# Altium PCB FIT_PM_Dual_Range_AFE.PcbDoc (part 7 of 17)
Units mm, origin at the board's own origin, x right, y up, seen from the top; angles counter-clockwise.
Board outline 259 x 114 mm, 8 copper layers (Top Layer, Mid-Layer 1, Mid-Layer 2, Layer 1, Layer 2, Mid-Layer 3, Mid-Layer 4, Bottom Layer), stack 1.616 mm thick; 963 components, 806 nets, 4757 pads, 2208 vias.
Unrouted connection lines stored in the file: 682.
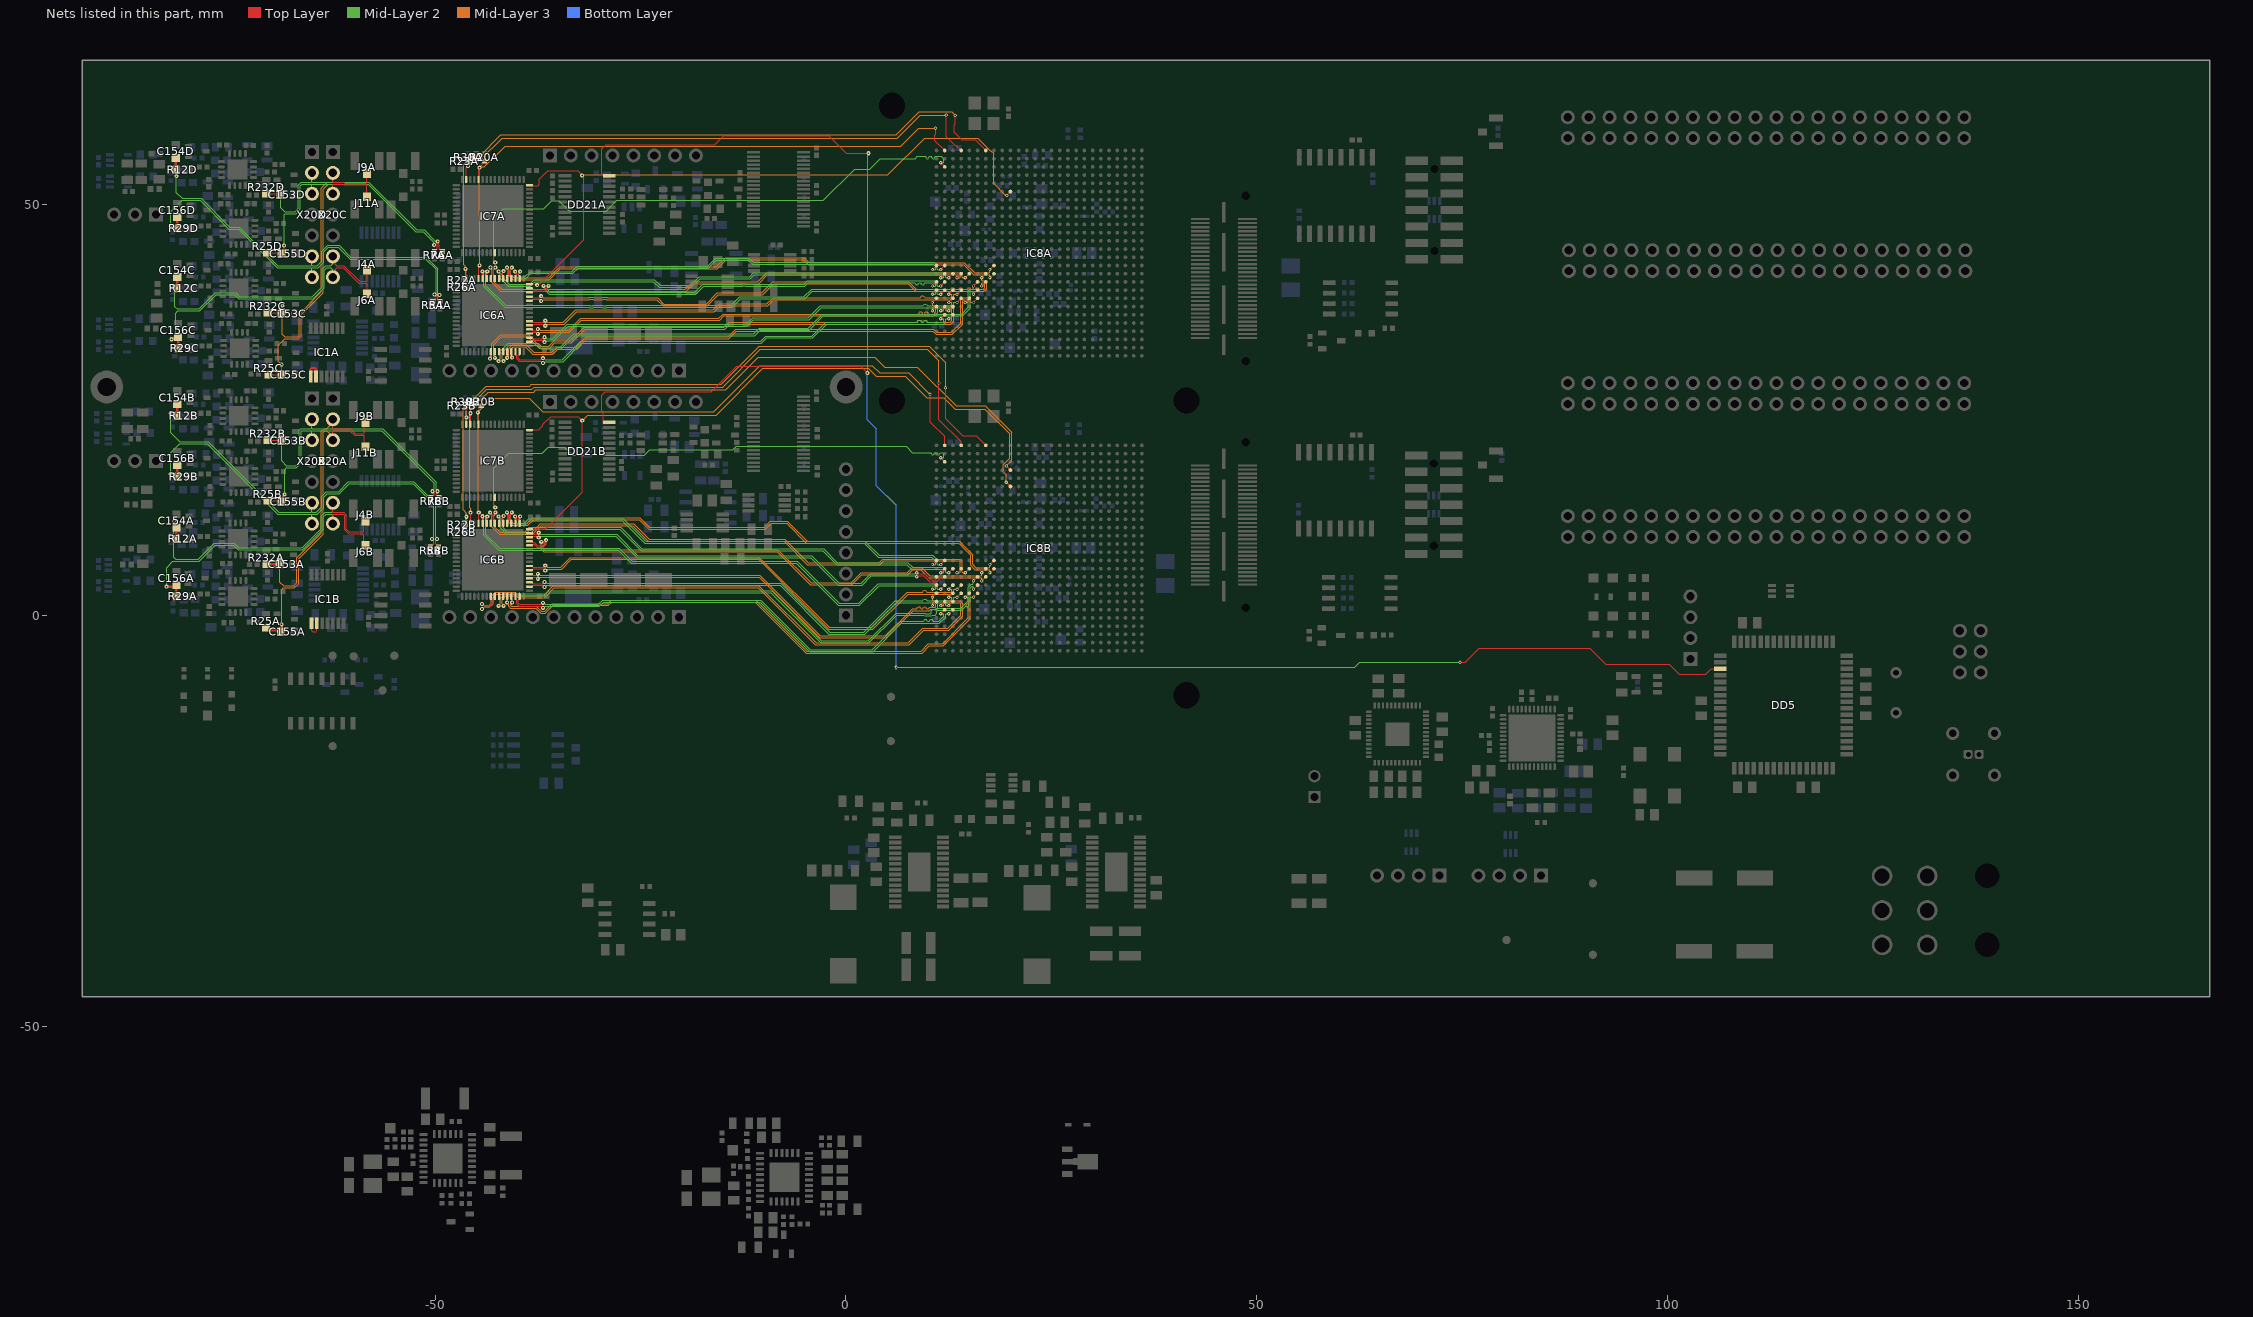
[diagram p9: the nets of this part, all layers, seen from the top]

## Via types
v1: diameter 0.5, hole 0.2, Top Layer to Bottom Layer, tented both sides, 1234 vias
v2: diameter 0.4, hole 0.2, Top Layer to Bottom Layer, tented both sides, 876 vias
v3: diameter 1, hole 0.6, Top Layer to Bottom Layer, tented both sides, 74 vias
v4: diameter 0.8, hole 0.4, Top Layer to Bottom Layer, tented both sides, 15 vias
v5: diameter 0.5, hole 0.2, Top Layer to Bottom Layer, 9 vias

## Nets (pads, with @x,y where several pads share a name; then routed paths per layer and width w, separated by ;. In a path a pad name is that pad's centre, name@x,y a point inside that pad or via, vN(x,y) a via of type N, cw(c..) or ccw(c..) an arc to the next point about the centre after c; other vN are vias at no path point) (continued)
ADC_DATA2: IC6B.14 IC7B.14 IC8B.AC17 | length 92.6
  Top Layer w0.1: IC6B.14@-45.727,11.206 -45.7,11.233 v1(-45.7,12.5) ; IC7B.14@-45.727,23.256 -45.7,23.283 v1(-45.7,24.6)
  Top Layer w0.145: v2(19.519,18.186) IC8B.AC17@20.019,17.686
  Mid-Layer 3 w0.1: v1(-45.7,12.5) -45.7,12.971 -45.8,13.071 -45.8,24.392 -45.7,24.492 v1(-45.7,24.6) -45.7,25.005 -43.548,27.157 -38.034,27.157 -37.748,27.443 -14.657,27.443 -10.7,31.4 3.525,31.4 4.725,30.2 8.705,30.2 13.4,25.505 16.925,25.505 20.169,22.261 20.169,18.836 v2(19.519,18.186)
ADC_DOUT1: IC6A.64 IC7A.64 IC8A.AA17 | length 84
  Top Layer w0.1: IC6A.64@-38.527,40.306 -38.489,40.344 -37.256,40.344 -31.9,45.7 -31.9,53.27 -32.118,53.488 v1(-32.118,53.547) -32.672,54.1 -36.3,54.1 -37.324,53.076 -37.324,52.453 -37.459,52.318 -38.489,52.318 IC7A.64@-38.527,52.356 ; v2(19.554,51.106) 19.554,51.114 20.019,51.578 IC8A.AA17@20.019,51.586
  Mid-Layer 3 w0.1: v1@-32.3,53.6 5.1,53.6 9.572,58.072 16.038,58.072 17.531,56.579 17.617,56.579 17.979,56.217 17.979,52.575 19.354,51.201 19.379,51.201 19.473,51.106 v2(19.554,51.106)
  other v1: -37.6,40.2
ADC_DOUT2: IC6B.64 IC7B.64 IC8B.AA17 | length 89.4
  Top Layer w0.1: IC6B.64@-38.527,10.506 -38.489,10.544 -36.556,10.544 -32.1,15 v1(-32.1,23.7) -32.6,24.2 -35.932,24.2 -36.9,23.232 -36.9,23.1 -37.406,22.594 -38.489,22.594 IC7B.64@-38.527,22.556
  Top Layer w0.145: v2(19.519,16.186) IC8B.AA17@20.019,15.686
  Mid-Layer 3 w0.1: v1(-32.1,23.7) -31.415,24.385 -15.815,24.385 -10.1,30.1 2.7,30.1 3.7,29.1 7.205,29.1 9.805,26.5 11.9,26.5 13.3,25.1 16.905,25.1 19.929,22.076 19.929,19.101 19.169,18.341 19.169,17.474 19.519,17.124 v2(19.519,16.186)
ADC_EN11: IC6A.15 IC8A.AF20 R22A.1 R26A.2 | length 85.8
  Top Layer w0.1: v1(-46.311,42.178) -46.235,42.102 -46.235,41.935 -46.2,41.9 -46.2,41.033 IC6A.15@-46.227,41.006 ; v2(13.3,60.85) 13.3,59.81 13.2,59.71 13.2,58.801 14.113,57.888 15.717,57.888 IC8A.AF20@17.019,56.586
  Mid-Layer 3 w0.1: v1(-46.311,42.178) -46.367,42.235 -46.367,42.528 -46.508,42.669 -46.508,53.992 -46.5,54 -46.5,54.9 -45.5,55.9 -44.6,55.9 -42,58.5 6.1,58.5 8.9,61.3 12.85,61.3 v2(13.3,60.85)
  Bottom Layer w0.1: v1(-46.311,42.178) -46.311,40.809 R22A.1@-46.307,40.806 R26A.2@-46.307,39.906
ADC_EN12: IC6B.15 IC8B.AF20 R22B.1 R26B.2 | length 91.8
  Top Layer w0.1: IC6B.15@-46.227,11.206 -46.2,11.233 v1(-46.2,12) ; v2(12.119,27.686) 12.119,23.952 14.226,21.845 15.86,21.845 IC8B.AF20@17.019,20.686
  Mid-Layer 3 w0.1: v1(-46.2,12) -46.2,12.434 -46.6,12.834 -46.6,25.1 -43.798,27.902 -38.506,27.902 -38.304,28.104 -15.196,28.104 -10.531,32.769 10.111,32.769 12.119,30.761 v2(12.119,27.686)
  Bottom Layer w0.1: R26B.2@-46.307,10.106 R22B.1@-46.307,11.006 -46.2,11.113 v1(-46.2,12)
ADC_EN21: IC7A.15 IC8A.AF23 R23A.1 R30A.2 | length 68.9
  Top Layer w0.1: IC7A.15@-46.227,53.056 -46.227,54.473 v1(-46,54.7) R23A.1@-46,55.3 ; v2(12.2,60.9) 12.2,58.263 13.217,57.245 13.359,57.245 IC8A.AF23@14.019,56.586
  Mid-Layer 3 w0.1: v1(-46,54.7) -45.122,55.578 -44.375,55.578 -41.861,58.092 6.228,58.092 9.036,60.9 v2(12.2,60.9)
  Bottom Layer w0.1: v1(-46,54.7) R30A.2@-46,55.3
ADC_EN22: IC7B.15 IC8B.AF23 R23B.1 R30B.2 | length 77.2
  Top Layer w0.1: R23B.1@-46.3,25.5 -46.2,25.4 v1(-46.2,24.1) -46.2,23.283 IC7B.15@-46.227,23.256 ; v2(11.319,28.286) 11.319,23.811 14.019,21.111 IC8B.AF23@14.019,20.686
  Mid-Layer 3 w0.1: v1(-46.2,24.1) -46.2,25 -43.698,27.502 -38.242,27.502 -37.973,27.77 -15.03,27.77 -10.406,32.394 9.893,32.394 11.319,30.968 v2(11.319,28.286)
  Bottom Layer w0.1: R30B.2@-46.3,25.5 -46.2,25.4 v1(-46.2,24.1)
ADC_PLL_PWRDNB: DD5.19 DD21A.12 DD21B.12 | length 243.4
  Top Layer w0.1: DD21B.12@-28.8,23.493 -29.375,23.493 -29.525,23.643 -29.525,24.725 -29.7,24.9 -29.7,26.8 -29.3,27.2 -16.4,27.2 -13.3,30.3 1.8,30.3 v1(2.6,29.5) ; DD21A.12@-28.8,53.492 -29.375,53.492 -29.7,53.817 -29.7,56.8 -29.2,57.3 -16,57.3 -14.9,58.4 -2.1,58.4 0.052,56.248 v1(2.723,56.248)
  Top Layer w0.15: v2(74.731,-5.714) 75.4,-5.714 77.1,-4.014 90.557,-4.014 92.498,-5.955 100.184,-5.955 101.421,-7.192 104.656,-7.192 105.334,-6.514 DD5.19@106.419,-6.514 DD5.19@106.34,-6.593
  Mid-Layer 2 w0.1: v2(6.1,-6.3) 61.933,-6.3 62.519,-5.714 v2(74.731,-5.714)
  Bottom Layer w0.1: v1(2.723,56.248) 2.662,56.186 2.662,29.562 v1(2.6,29.5) 2.6,23.8 3.7,22.7 3.7,15.8 6.1,13.4 6.1,-6.6
ADC_RESET1: IC6A.12 IC7A.12 IC8A.AF25 R20A.1 | length 76.9
  Top Layer w0.1: IC6A.12@-44.727,41.006 -44.727,42.373 -44.6,42.5 v1(-44.6,42.6) ; IC7A.12@-44.727,53.056 -44.727,54.149 -44.671,54.205 -44.671,54.429 -44.26,54.84 -44.26,55.06 -44.02,55.3 R20A.1@-44,55.3 ; v2(10.9,59.3) 10.9,58.543 10.819,58.462 10.819,57.786 IC8A.AF25@12.019,56.586
  Mid-Layer 3 w0.1: v1(-44.6,42.6) -44.6,42.975 -44.592,42.983 -44.592,48.486 -44.66,48.554 -44.66,54.44 -44.5,54.6 -44,54.6 -41.5,57.1 6.683,57.1 8.883,59.3 v2(10.9,59.3)
  other v1: -44.6,54.5
ADC_RESET2: IC6B.12 IC7B.12 IC8B.AF25 R20B.1 | length 83.2
  Top Layer w0.1: IC6B.12@-44.727,11.206 -44.7,11.233 v1(-44.7,12.5) ; IC7B.12@-44.727,23.256 -44.766,23.294 -44.766,24.666 v1(-44.8,24.7) -44.8,24.808 -44.66,24.948 -44.66,25.26 -44.42,25.5 R20B.1@-44.4,25.5 ; v2(10.227,26.931) 10.272,26.886 10.272,23.521 12.019,21.774 IC8B.AF25@12.019,20.686
  Mid-Layer 3 w0.1: v1(-44.7,12.5) -44.75,12.55 -44.75,24.65 v1(-44.8,24.7) -43.071,26.429 -38.529,26.429 -36.9,24.8 -16.1,24.8 -10.5,30.4 3.2,30.4 4.1,29.5 7.658,29.5 v2(10.227,26.931)
ADC_VREFA: IC1A.8 IC1A.9 | length 2.7
  Top Layer w0.2: IC1A.8@-65.15,29.05 -65.2,29.1 -65.2,29.983 -65.083,30.1 -64.617,30.1 -64.5,29.983 IC1A.9@-64.5,29.05
ADC_VREFB: IC1B.8 IC1B.9 | length 2.6
  Top Layer w0.145: IC1B.8@-65.054,-0.963 -65.054,-1.846 -64.9,-2 -64.5,-2 -64.404,-1.904 IC1B.9@-64.404,-0.963
ADCA_VINA_N: C155A.2 J11B.1 R25A.2 X20A.3 | length 37.8
  Top Layer w0.1: X20A.3@-62.46,21.32 -62.46,22.431 -62.401,22.49 -61.447,22.49 -60.4,22.49 -59.81,21.9 -58.7,21.9 -58.641,21.841 -58.641,20.666 J11B.1@-58.5,20.525
  Top Layer w0.3: R25A.2@-70.6,-1.5 -70.3,-1.8 -69,-1.8 C155A.2@-68.8,-2 -68.7,-1.9 v1(-68.7,-1.1)
  Mid-Layer 3 w0.1: v1(-68.7,-1.1) -68.7,3.137 -68.494,3.343 -67.132,3.343 -66.6,3.875 -66.6,6.9 -63.6,9.9 -63.6,22.3 -63.43,22.47 -63.2,22.47 -62.46,21.73 X20A.3@-62.46,21.32
ADCA_VINA_P: C153A.2 J9B.1 R232A.2 X20A.2 | length 36.5
  Top Layer w0.1: X20A.2@-62.46,23.86 -62.46,22.749 -62.401,22.69 -61.53,22.69 -60.317,22.69 -59.727,22.1 -58.7,22.1 -58.641,22.159 -58.641,23.334 J9B.1@-58.5,23.475
  Top Layer w0.3: R232A.2@-70.55,6.225 C153A.2@-68.95,6.225 -68.9,6.275 v1(-68.9,7.1)
  Mid-Layer 3 w0.1: v1(-68.9,7.1) -68.9,4.04 -68.443,3.583 -67.231,3.583 -66.84,3.974 -66.84,6.999 -63.84,9.999 -63.84,22.399 -63.529,22.71 -63.2,22.71 -62.46,23.45 X20A.2@-62.46,23.86
ADCA_VINB_N: C155B.2 R7B.1 R25B.2 X20B.3 | length 35.2
  Top Layer w0.145: R25B.2@-70.4,13.929 -68.8,13.929 C155B.2@-68.7,13.829 -68.581,13.948 -68.581,14.461 v1(-68.324,14.718) ; R7B.1@-50.5,14.34 -50.283,14.557 -50.229,14.557 -50.144,14.642 -50.144,14.848 -50.144,14.949 -50.295,15.1 v1(-50.322,15.1)
  Mid-Layer 2 w0.1: v1(-68.324,14.718) -68.324,17.736 -68.1,17.96 -66.9,17.96 -66.3,18.56 -66.3,22.411 -66.241,22.47 -65.629,22.47 -65.059,22.47 -65,22.411 ; v1(-50.322,15.1) -50.322,15.179 -50.142,15.359 -50.142,16.107 -56.504,22.47 -64.941,22.47 -65,22.411 ; -65,22.411 X20B.3@-65,21.32 -65,22.411
ADCA_VINB_P: C153B.2 R6B.1 R232B.2 X20B.2 | length 36.2
  Top Layer w0.145: R232B.2@-70.4,21.329 -68.8,21.329 C153B.2@-68.7,21.229 v1(-68.7,22.1) ; v1(-49.722,15.1) -49.748,15.1 -49.899,14.949 -49.899,14.642 -49.814,14.557 -49.761,14.557 R6B.1@-49.543,14.34
  Mid-Layer 2 w0.1: v1(-68.7,22.1) -68.7,18.8 -68.1,18.2 -66.999,18.2 -66.54,18.659 -66.54,22.511 -66.341,22.71 -65.53,22.71 -65.059,22.71 -65,22.769 ; v1(-49.722,15.1) -49.722,15.179 -49.902,15.359 -49.902,16.207 -56.405,22.71 -64.941,22.71 -65,22.769 ; -65,22.769 X20B.2@-65,23.86 -65,22.769
ADCA_VINC_N: C155C.2 J11A.1 R25C.2 X20C.3 | length 36.9
  Top Layer w0.1: X20C.3@-62.46,51.32 -62.46,52.431 -62.401,52.49 -61.847,52.49 -61.2,52.49 -61.11,52.4 -58.4,52.4 -58.341,52.341 -58.341,50.973 J11A.1@-58.3,50.932
  Top Layer w0.145: R25C.2@-70.3,29.3 C155C.2@-68.7,29.3 v1(-68.7,30.5)
  Mid-Layer 3 w0.1: v1(-68.7,30.5) -69.1,30.9 -69.1,32.86 -68.3,33.66 -66.601,33.66 -66.3,33.961 -66.3,36.561 -63.6,39.261 -63.6,51.884 -63.014,52.47 -62.519,52.47 -62.46,52.411 X20C.3@-62.46,51.32
ADCA_VINC_P: C153C.2 J9A.1 R232C.2 X20C.2 | length 36.8
  Top Layer w0.1: X20C.2@-62.46,53.86 -62.46,52.749 -62.401,52.69 -61.93,52.69 -61.117,52.69 -61.027,52.6 -58.4,52.6 -58.341,52.659 -58.341,53.734 J9A.1@-58.3,53.775
  Top Layer w0.145: R232C.2@-70.4,36.829 -68.8,36.829 C153C.2@-68.7,36.729 -68.6,36.829 v1(-68.6,37.7)
  Mid-Layer 3 w0.1: v1(-68.6,37.7) -68.6,34.2 -68.3,33.9 -66.7,33.9 -66.54,34.06 -66.54,36.66 -63.84,39.36 -63.84,51.983 -63.113,52.71 -62.519,52.71 -62.46,52.769 X20C.2@-62.46,53.86
ADCA_VIND_N: C155D.2 R7A.1 R25D.2 X20D.3 | length 34.8
  Top Layer w0.145: R25D.2@-70.4,44.129 -68.8,44.129 C155D.2@-68.7,44.029 -68.387,44.341 v1(-68.387,45.018) ; v1(-50.126,45.074) -50.1,45.1 -49.9,45.1 -49.744,44.944 -49.744,44.73 -49.744,44.602 -49.829,44.517 -49.883,44.517 R7A.1@-50.1,44.3
  Mid-Layer 2 w0.1: v1(-68.387,45.018) -68.387,48.773 -68.26,48.9 -66.938,48.9 -66.4,49.438 -66.4,52.27 -66.2,52.47 -65.579,52.47 -65.059,52.47 -65,52.411 ; v1(-50.126,45.074) -50.181,45.13 -50.181,45.385 -51.462,46.665 -52.365,46.665 -58.17,52.47 -64.941,52.47 -65,52.411 ; -65,52.411 X20D.3@-65,51.32 -65,52.411
ADCA_VIND_P: C153D.2 R6A.1 R232D.2 X20D.2 | length 34.3
  Top Layer w0.145: R232D.2@-70.568,51.296 -68.968,51.296 C153D.2@-68.868,51.196 -68.8,51.264 v1(-68.8,52.1) ; v1(-49.701,45.499) -49.727,45.473 -49.727,45.273 -49.499,45.046 -49.499,44.831 -49.499,44.602 -49.414,44.517 -49.361,44.517 R6A.1@-49.143,44.3
  Mid-Layer 2 w0.1: v1(-68.8,52.1) -68.8,49.6 -68.34,49.14 -67.038,49.14 -66.64,49.538 -66.64,52.369 -66.299,52.71 -65.48,52.71 -65.059,52.71 -65,52.769 ; v1(-49.701,45.499) -49.757,45.554 -50.011,45.554 -51.362,46.905 -52.266,46.905 -58.071,52.71 -64.941,52.71 -65,52.769 ; -65,52.769 X20D.2@-65,53.86 -65,52.769
ADCAA_D0_N1: IC6A.41 IC8A.G25 | length 65.1
  Top Layer w0.1: v1(-42.73,31.344) v1(-42.73,31.344) -42.729,32.105 IC6A.41@-42.727,32.106
  Top Layer w0.145: v2(11.519,37.086) IC8A.G25@12.019,37.586
  Mid-Layer 3 w0.1: v1(-42.73,31.344) -42.664,31.41 -42.691,31.41 -42.884,31.603 -42.884,32.959 -41.943,33.9 -38.725,33.9 -37.362,32.538 -36.062,32.538 -35.44,33.16 -33.422,33.16 -31.752,34.83 -14.748,34.83 -14.125,35.453 12.772,35.453 13.109,35.791 13.109,37.33 12.764,37.676 12.248,37.676 11.899,37.327 11.899,37.144 11.841,37.086 v2(11.519,37.086)
ADCAA_D0_N2: IC6B.41 IC8B.G25 | length 72.9
  Top Layer w0.1: v1(-44.302,0.775) -44.244,0.775 -44.044,0.975 -43.419,0.975 -42.877,1.517 -42.877,1.847 -42.727,1.997 IC6B.41@-42.727,2.306
  Top Layer w0.145: v2(11.519,1.186) IC8B.G25@12.019,1.686
  Mid-Layer 3 w0.1: v1(-44.302,0.775) -44.224,0.775 -44.044,0.955 -43.398,0.955 -42.956,1.398 -42.956,2.209 -42.605,2.56 -40.331,2.56 -39.917,2.146 -36.738,2.146 -35.525,3.36 -10.699,3.36 -3.739,-3.6 7.7,-3.6 9.46,-1.84 12.514,-1.84 14.24,-0.114 14.24,1.5 13.937,1.803 12.162,1.803 11.899,1.541 11.899,1.244 11.841,1.186 v2(11.519,1.186)
ADCAA_D0_P1: IC6A.40 IC8A.G24 | length 65.1
  Top Layer w0.1: v1(-43.322,31.244) -43.266,31.3 -43.266,32.068 IC6A.40@-43.227,32.106
  Top Layer w0.145: v2(12.519,37.086) IC8A.G24@13.019,37.586
  Mid-Layer 3 w0.1: v1(-43.322,31.244) -43.322,31.318 -43.124,31.515 -43.124,33.058 -42.042,34.14 -38.625,34.14 -37.263,32.778 -36.162,32.778 -35.539,33.4 -33.521,33.4 -31.851,35.07 -14.847,35.07 -14.224,35.693 8.672,35.693 8.722,35.693 8.811,35.781 8.811,35.858 8.899,35.947 9.076,35.947 9.165,35.858 9.165,35.781 9.253,35.693 9.43,35.693 9.519,35.781 9.519,35.858 9.607,35.947 9.784,35.947 9.873,35.858 9.873,35.781 9.961,35.693 10.019,35.693 12.672,35.693 12.869,35.89 12.869,37.231 12.664,37.436 12.348,37.436 12.139,37.227 12.139,37.144 12.198,37.086 v2(12.519,37.086)
ADCAA_D0_P2: IC6B.40 IC8B.G24 | length 71.4
  Top Layer w0.1: v1(-44.302,1.375) -44.244,1.375 -44.044,1.175 -43.502,1.175 -43.077,1.6 -43.077,1.847 -43.227,1.997 IC6B.40@-43.227,2.306
  Top Layer w0.145: v2(12.519,1.186) IC8B.G24@13.019,1.686
  Mid-Layer 3 w0.1: v1(-44.302,1.375) -44.224,1.375 -44.044,1.195 -43.497,1.195 -43.196,1.497 -43.196,2.308 -42.704,2.8 -40.231,2.8 -39.817,2.386 -36.838,2.386 -35.624,3.6 -10.6,3.6 -3.64,-3.36 7.6,-3.36 9.361,-1.6 12.415,-1.6 14,-0.015 14,1.401 13.837,1.563 12.261,1.563 12.139,1.441 12.139,1.244 12.198,1.186 v2(12.519,1.186)
ADCAA_D2_N1: IC6A.43 IC8A.J21 | length 65.5
  Top Layer w0.1: IC6A.43@-41.727,32.106 -41.727,31.797 -41.877,31.647 -41.877,31.209 -41.677,31.009 v1(-41.677,30.95)
  Top Layer w0.145: v2(15.519,39.086) IC8A.J21@16.019,39.586
  Mid-Layer 2 w0.1: v1(-41.677,30.95) -41.677,31.029 -41.857,31.209 -41.857,32.043 -41,32.9 -37.548,32.9 -37.102,32.454 -34.642,32.454 -33.036,34.06 -11.101,34.06 -10.439,34.721 -4.485,34.721 -2.767,36.439 14.189,36.439 15.151,37.401 15.151,39.4 15.217,39.466 15.461,39.466 15.519,39.407 v2(15.519,39.086)
ADCAA_D2_N2: IC6B.43 IC8B.J21 | length 67.7
  Top Layer w0.1: IC6B.43@-41.727,2.306 -41.727,1.997 -41.877,1.847 -41.877,1.409 -41.677,1.209 v1(-41.677,1.15)
  Top Layer w0.145: v2(15.519,3.186) IC8B.J21@16.019,3.686
  Mid-Layer 2 w0.1: v1(-41.677,1.15) -41.677,1.229 -41.857,1.409 -41.857,1.943 -41.44,2.36 -36.44,2.36 -36.075,2.724 -9.164,2.724 -3.085,-3.354 2.802,-3.354 6.191,0.035 9.494,0.035 9.565,-0.036 10.409,-0.036 10.486,0.04 10.568,0.04 10.574,0.035 10.864,0.035 11.069,0.24 11.069,0.494 11.171,0.596 14.075,0.596 14.277,0.798 14.563,1.084 14.688,1.084 14.724,1.048 14.849,1.048 14.974,1.173 14.974,1.298 14.938,1.334 14.938,1.459 15.091,1.612 15.151,1.672 15.151,3.343 15.378,3.57 15.461,3.57 15.519,3.511 v2(15.519,3.186)
ADCAA_D2_P1: IC6A.42 IC8A.K21 | length 65.9
  Top Layer w0.1: v1(-42.277,30.95) -42.277,31.009 -42.077,31.209 -42.077,31.647 -42.227,31.797 IC6A.42@-42.227,32.106
  Top Layer w0.145: v2(15.519,40.086) IC8A.K21@16.019,40.586
  Mid-Layer 2 w0.1: v1(-42.277,30.95) -42.277,31.029 -42.097,31.209 -42.097,32.142 -41.099,33.14 -37.448,33.14 -37.002,32.694 -34.741,32.694 -33.135,34.3 -11.2,34.3 -10.539,34.961 -4.584,34.961 -2.867,36.679 14.09,36.679 14.911,37.5 14.911,39.5 15.117,39.706 15.461,39.706 15.519,39.764 v2(15.519,40.086)
ADCAA_D2_P2: IC6B.42 IC8B.K21 | length 67.9
  Top Layer w0.1: v1(-42.277,1.15) -42.277,1.209 -42.077,1.409 -42.077,1.847 -42.227,1.997 IC6B.42@-42.227,2.306
  Top Layer w0.145: v2(15.519,4.194) 15.523,4.194 16.015,4.686 IC8B.K21@16.019,4.686
  Mid-Layer 2 w0.1: v1(-42.277,1.15) -42.277,1.229 -42.097,1.409 -42.097,2.042 -41.539,2.6 -36.539,2.6 -36.175,2.964 -9.064,2.964 -2.986,-3.114 2.702,-3.114 6.092,0.275 9.594,0.275 9.665,0.204 10.31,0.204 10.369,0.263 10.369,0.53 10.574,0.735 10.864,0.735 10.876,0.723 10.959,0.723 11.072,0.836 13.975,0.836 14.107,0.968 14.911,1.772 14.911,3.443 15.278,3.81 15.461,3.81 15.519,3.868 v2(15.519,4.194)
ADCAA_D4_N1: IC6A.45 IC8A.H22 | length 64.2
  Top Layer w0.1: IC6A.45@-40.727,32.106 -40.689,32.068 -40.689,31.415 v1(-40.64,31.366)
  Top Layer w0.145: v2(14.519,38.086) IC8A.H22@15.019,38.586
  Mid-Layer 3 w0.1: v1(-40.64,31.366) -40.64,31.445 -40.82,31.625 -40.82,32.38 -40.5,32.7 -39.039,32.7 -38.099,31.76 -35.72,31.76 -35.061,32.419 -32.789,32.419 -31.528,33.68 -14.239,33.68 -13.331,34.589 10.592,34.589 10.98,34.201 12.941,34.201 14.2,35.461 14.2,38.3 14.336,38.436 14.763,38.436 14.899,38.3 14.899,38.144 14.841,38.086 v2(14.519,38.086)
ADCAA_D4_N2: IC6B.45 IC8B.H22 | length 65.9
  Top Layer w0.1: IC6B.45@-40.727,2.306 -40.689,2.268 -40.689,1.615 v1(-40.64,1.566)
  Top Layer w0.145: v2(14.519,2.186) IC8B.H22@15.019,2.686
  Mid-Layer 3 w0.1: v1(-40.64,1.566) -40.64,1.488 -40.82,1.308 -40.82,1.181 -40.762,1.122 -37.683,1.122 -37.072,0.512 -36.688,0.512 -35.76,1.44 -29.01,1.44 -28.589,1.861 -10.968,1.861 -4.762,-4.345 9.155,-4.345 10.04,-3.46 11.757,-3.46 14.905,-0.313 14.905,0.884 ; v2(14.519,2.186) 14.841,2.186 14.899,2.127 14.899,1.76 14.899,1.471 14.811,1.382 14.734,1.382 14.645,1.294 14.645,1.117 14.734,1.028 14.811,1.028 14.899,0.94 14.899,0.89
ADCAA_D4_P1: IC6A.44 IC8A.H21 | length 65
  Top Layer w0.1: v1(-41.24,31.361) -41.234,31.367 -41.234,32.099 IC6A.44@-41.227,32.106
  Top Layer w0.145: v2(15.519,38.086) IC8A.H21@16.019,38.586
  Mid-Layer 3 w0.1: v1(-41.24,31.361) -41.24,31.44 -41.06,31.62 -41.06,32.479 -40.599,32.94 -38.94,32.94 -38,32 -35.819,32 -35.16,32.659 -32.889,32.659 -31.627,33.92 -14.339,33.92 -13.43,34.829 10.692,34.829 11.079,34.441 12.841,34.441 13.96,35.56 13.96,38.399 14.236,38.676 14.863,38.676 15.139,38.399 15.139,38.144 15.198,38.086 v2(15.519,38.086)
ADCAA_D4_P2: IC6B.44 IC8B.H21 | length 66.3
  Top Layer w0.1: v1(-41.24,1.561) -41.234,1.567 -41.234,2.299 IC6B.44@-41.227,2.306
  Top Layer w0.145: v2(15.519,2.186) IC8B.H21@16.019,2.686
  Mid-Layer 3 w0.1: v1(-41.24,1.561) -41.24,1.482 -41.06,1.302 -41.06,1.081 -40.861,0.882 -37.782,0.882 -37.172,0.272 -36.589,0.272 -35.661,1.2 -28.91,1.2 -28.489,1.621 -11.067,1.621 -4.862,-4.585 9.255,-4.585 10.139,-3.7 11.857,-3.7 15.145,-0.412 15.145,2.127 15.203,2.186 v2(15.519,2.186)
ADCAA_D6_N1: IC6A.47 IC8A.F25 | length 56.8
  Top Layer w0.1: IC6A.47@-39.727,32.106 -39.727,31.797 -39.877,31.647 -39.877,31.3 -39.698,31.12 -37.136,31.12 -36.944,31.312 v1(-36.877,31.312)
  Top Layer w0.145: v2(11.519,36.086) IC8A.F25@12.019,36.586
  Mid-Layer 2 w0.1: v1(-36.877,31.312) -36.798,31.312 -36.618,31.132 -34.508,31.132 -32.299,33.34 -10.399,33.34 -9.739,34 -4.156,34 -2.463,35.693 8.377,35.693 8.633,35.693 8.721,35.781 8.721,35.858 8.81,35.947 8.987,35.947 9.075,35.858 9.075,35.781 9.164,35.693 9.341,35.693 9.429,35.781 9.429,35.858 9.518,35.947 9.695,35.947 9.783,35.858 9.783,35.781 9.872,35.693 10.276,35.693 11.841,35.693 11.899,35.752 11.899,36.027 11.841,36.086 v2(11.519,36.086)
ADCAA_D6_N2: IC6B.47 IC8B.F25 | length 59.2
  Top Layer w0.1: IC6B.47@-39.727,2.306 -39.727,1.997 -39.877,1.847 -39.877,1.5 -39.698,1.32 -37.136,1.32 -36.944,1.512 v1(-36.877,1.512)
  Top Layer w0.145: v2(11.519,0.186) IC8B.F25@12.019,0.686
  Mid-Layer 2 w0.1: v1(-36.877,1.512) -36.798,1.512 -36.618,1.332 -30.143,1.332 -29.613,1.861 -10.361,1.861 -4.331,-4.169 3.215,-4.169 6.648,-0.736 9.362,-0.736 9.412,-0.736 9.501,-0.647 9.501,-0.57 9.589,-0.482 9.766,-0.482 9.855,-0.57 9.855,-0.647 9.943,-0.736 10.12,-0.736 10.209,-0.647 10.209,-0.57 10.297,-0.482 10.474,-0.482 10.563,-0.57 10.563,-0.647 10.651,-0.736 10.922,-0.736 11.28,-0.736 11.899,-0.117 11.899,0.127 11.841,0.186 v2(11.519,0.186)
ADCAA_D6_P1: IC6A.46 IC8A.F24 | length 56.9
  Top Layer w0.1: IC6A.46@-40.227,32.106 -40.227,31.797 -40.077,31.647 -40.077,31.217 -39.781,30.92 -37.142,30.92 -36.934,30.712 v1(-36.875,30.712)
  Top Layer w0.145: v2(12.519,36.086) IC8A.F24@13.019,36.586
  Mid-Layer 2 w0.1: v1(-36.875,30.712) -36.796,30.712 -36.616,30.892 -34.408,30.892 -32.2,33.1 -10.3,33.1 -9.64,33.76 -4.057,33.76 -2.364,35.453 11.94,35.453 12.139,35.652 12.139,36.027 12.198,36.086 v2(12.519,36.086)
ADCAA_D6_P2: IC6B.46 IC8B.F24 | length 59.4
  Top Layer w0.1: IC6B.46@-40.227,2.306 -40.227,1.997 -40.077,1.847 -40.077,1.417 -39.781,1.12 -37.142,1.12 -36.934,0.912 v1(-36.875,0.912)
  Top Layer w0.145: v2(12.519,0.186) IC8B.F24@13.019,0.686
  Mid-Layer 2 w0.1: v1(-36.875,0.912) -36.796,0.912 -36.616,1.092 -30.043,1.092 -29.514,1.621 -10.46,1.621 -4.431,-4.409 3.315,-4.409 6.747,-0.976 9.362,-0.976 11.379,-0.976 12.139,-0.216 12.139,0.127 12.198,0.186 v2(12.519,0.186)
ADCAA_D8_N1: IC6A.51 IC8A.H24 | length 54.9
  Top Layer w0.1: IC6A.51@-38.527,33.806 -38.219,33.806 -38.069,33.656 -36.9,33.656 v1(-36.7,33.856)
  Top Layer w0.145: v2(12.519,38.086) IC8A.H24@13.019,38.586
  Mid-Layer 2 w0.1: v1(-36.7,33.856) -36.621,33.856 -36.441,33.676 -35.663,33.676 -33.899,35.44 -12.16,35.44 -11.36,36.24 -4.572,36.24 -3.124,37.688 9.335,37.688 9.385,37.688 9.474,37.777 9.474,37.808 9.562,37.896 9.739,37.896 9.828,37.808 9.828,37.777 9.916,37.688 10.019,37.688 12.754,37.688 12.899,37.834 12.899,38.027 12.841,38.086 v2(12.519,38.086)
ADCAA_D8_N2: IC6B.51 IC8B.H24 | length 57.2
  Top Layer w0.1: IC6B.51@-38.527,4.006 -38.219,4.006 -38.069,3.856 -36.9,3.856 v1(-36.7,4.056)
  Top Layer w0.145: v2(12.519,2.186) IC8B.H24@13.019,2.686
  Mid-Layer 2 w0.1: v1(-36.7,4.056) -36.593,4.056 -36.441,3.905 -7.921,3.905 -1.984,-2.032 2.178,-2.032 5.99,1.78 9.289,1.78 9.339,1.78 9.427,1.868 9.427,1.895 9.516,1.984 9.693,1.984 9.781,1.895 9.781,1.868 9.87,1.78 10.37,1.78 12.745,1.78 12.899,1.934 12.899,2.127 12.841,2.186 v2(12.519,2.186)
ADCAA_D8_P1: IC6A.50 IC8A.H23 | length 55.1
  Top Layer w0.1: IC6A.50@-38.527,33.306 -38.219,33.306 -38.069,33.456 -36.9,33.456 v1(-36.7,33.256)
  Top Layer w0.145: v2(13.519,38.086) IC8A.H23@14.019,38.586
  Mid-Layer 2 w0.1: v1(-36.7,33.256) -36.621,33.256 -36.441,33.436 -35.563,33.436 -33.799,35.2 -12.061,35.2 -11.261,36 -4.473,36 -3.025,37.448 12.853,37.448 13.139,37.734 13.139,38.027 13.198,38.086 v2(13.519,38.086)
ADCAA_D8_P2: IC6B.50 IC8B.H23 | length 57.5
  Top Layer w0.1: IC6B.50@-38.527,3.506 -38.219,3.506 -38.069,3.656 -36.9,3.656 v1(-36.7,3.456)
  Top Layer w0.145: v2(13.519,2.186) IC8B.H23@14.019,2.686
  Mid-Layer 2 w0.1: v1(-36.7,3.456) -36.65,3.456 -36.441,3.665 -8.021,3.665 -2.084,-2.272 2.277,-2.272 6.089,1.54 9.289,1.54 12.844,1.54 13.139,1.834 13.139,2.127 13.198,2.186 v2(13.519,2.186)
ADCAA_D10_N1: IC6A.53 IC8A.G26 | length 53.1
  Top Layer w0.1: IC6A.53@-38.527,34.806 -38.219,34.806 -38.069,34.656 -37.7,34.656 v1(-37.5,34.856)
  Top Layer w0.145: v2(10.519,37.086) IC8A.G26@11.019,37.586
  Mid-Layer 3 w0.1: v1(-37.5,34.856) -37.421,34.856 -37.241,34.676 -33.764,34.676 -32.299,36.14 -15.49,36.14 -14.951,36.679 8.769,36.679 8.819,36.679 8.908,36.767 8.908,36.844 8.996,36.933 9.173,36.933 9.262,36.844 9.262,36.767 9.35,36.679 9.527,36.679 9.616,36.767 9.616,36.844 9.704,36.933 9.881,36.933 9.97,36.844 9.97,36.767 10.058,36.679 10.154,36.679 10.66,36.679 10.927,36.946 10.927,37.406 10.868,37.464 10.626,37.464 10.577,37.415 10.577,37.143 v2(10.519,37.086)
ADCAA_D10_N2: IC6B.53 IC8B.G26 | length 56.7
  Top Layer w0.1: IC6B.53@-38.527,5.006 -38.219,5.006 -38.069,4.856 -37.7,4.856 v1(-37.5,5.056)
  Top Layer w0.145: v2(10.519,1.186) IC8B.G26@11.019,1.686
  Mid-Layer 3 w0.1: v1(-37.5,5.056) -37.421,5.056 -37.241,4.876 -10.476,4.876 -3.11,-2.49 4.809,-2.49 8.104,0.805 8.565,0.805 8.615,0.805 8.703,0.893 8.703,0.97 8.792,1.059 8.969,1.059 9.057,0.97 9.057,0.893 9.146,0.805 9.323,0.805 9.411,0.893 9.411,0.97 9.5,1.059 9.677,1.059 9.765,0.97 9.765,0.893 9.854,0.805 10.019,0.805 10.19,0.975 10.856,0.975 10.927,1.046 10.927,1.506 10.868,1.564 10.626,1.564 10.577,1.515 10.577,1.243 v2(10.519,1.186)
ADCAA_D10_P1: IC6A.52 IC8A.H26 | length 53.3
  Top Layer w0.1: IC6A.52@-38.527,34.306 -38.219,34.306 -38.069,34.456 -37.7,34.456 v1(-37.5,34.256)
  Top Layer w0.145: v2(10.519,38.086) IC8A.H26@11.019,38.586
  Mid-Layer 3 w0.1: v1(-37.5,34.256) -37.421,34.256 -37.241,34.436 -33.664,34.436 -32.2,35.9 -15.39,35.9 -14.852,36.439 10.759,36.439 11.167,36.846 11.167,37.505 10.968,37.704 10.626,37.704 10.577,37.753 10.577,38.028 v2(10.519,38.086)
ADCAA_D10_P2: IC6B.52 IC8B.H26 | length 56.9
  Top Layer w0.1: IC6B.52@-38.527,4.506 -38.219,4.506 -38.069,4.656 -37.7,4.656 v1(-37.5,4.456)
  Top Layer w0.145: v2(10.519,2.186) IC8B.H26@11.019,2.686
  Mid-Layer 3 w0.1: v1(-37.5,4.456) -37.421,4.456 -37.241,4.636 -10.575,4.636 -3.21,-2.73 4.908,-2.73 8.203,0.565 10.119,0.565 10.289,0.735 10.956,0.735 11.167,0.946 11.167,1.605 10.968,1.804 10.626,1.804 10.577,1.853 10.577,2.128 v2(10.519,2.186)
ADCAA_D12_N1: IC6A.55 IC8A.J24 | length 54.5
  Top Layer w0.1: IC6A.55@-38.527,35.806 -38.219,35.806 -38.069,35.656 -36.8,35.656 v1(-36.6,35.856)
  Top Layer w0.145: v2(12.519,39.086) IC8A.J24@13.019,39.586
  Mid-Layer 3 w0.1: v1(-36.6,35.856) -36.521,35.856 -36.341,35.676 -34.394,35.676 -32.9,37.17 -16.133,37.17 -15.403,37.9 -9.639,37.9 -8.864,38.676 9.019,38.676 9.069,38.676 9.158,38.764 9.158,38.815 9.246,38.903 9.423,38.903 9.512,38.815 9.512,38.764 9.6,38.676 10.019,38.676 12.793,38.676 12.899,38.782 12.899,39.027 12.841,39.086 v2(12.519,39.086)
ADCAA_D12_N2: IC6B.55 IC8B.J24 | length 59.1
  Top Layer w0.1: IC6B.55@-38.527,6.006 -38.219,6.006 -38.069,5.856 -36.8,5.856 v1(-36.6,6.056)
  Top Layer w0.145: v2(12.519,3.186) IC8B.J24@13.019,3.686
  Mid-Layer 3 w0.1: v1(-36.6,6.056) -36.521,6.056 -36.341,5.876 -34.709,5.876 -33.545,7.04 -10.54,7.04 -2.023,-1.477 3.157,-1.477 7.459,2.826 9.272,2.826 9.322,2.826 9.41,2.914 9.41,2.965 9.499,3.053 9.676,3.053 9.764,2.965 9.764,2.914 9.853,2.826 10.019,2.826 12.843,2.826 12.899,2.882 12.899,3.127 12.841,3.186 v2(12.519,3.186)
ADCAA_D12_P1: IC6A.54 IC8A.J23 | length 54.7
  Top Layer w0.1: IC6A.54@-38.527,35.306 -38.219,35.306 -38.069,35.456 -36.8,35.456 v1(-36.6,35.256)
  Top Layer w0.145: v2(13.519,39.086) IC8A.J23@14.019,39.586
  Mid-Layer 3 w0.1: v1(-36.6,35.256) -36.521,35.256 -36.341,35.436 -34.295,35.436 -32.801,36.93 -16.033,36.93 -15.303,37.66 -9.54,37.66 -8.764,38.436 12.892,38.436 13.139,38.683 13.139,39.027 13.198,39.086 v2(13.519,39.086)
ADCAA_D12_P2: IC6B.54 IC8B.J23 | length 59.2
  Top Layer w0.1: IC6B.54@-38.527,5.506 -38.219,5.506 -38.069,5.656 -36.8,5.656 v1(-36.6,5.456)
  Top Layer w0.145: v2(13.519,3.186) IC8B.J23@14.019,3.686
  Mid-Layer 3 w0.1: v1(-36.6,5.456) -36.521,5.456 -36.341,5.636 -34.61,5.636 -33.446,6.8 -10.639,6.8 -2.123,-1.717 3.256,-1.717 7.559,2.586 12.942,2.586 13.139,2.783 13.139,3.127 13.198,3.186 v2(13.519,3.186)
ADCAB_D0_N1: IC6A.61 IC8A.K20 | length 60.3
  Top Layer w0.1: IC6A.61@-38.527,38.806 -38.219,38.806 -38.069,38.656 -37.2,38.656 -37.1,38.756 v1(-37.1,38.856)
  Top Layer w0.145: v2(16.519,40.086) IC8A.K20@17.019,40.586
  Mid-Layer 3 w0.1: v1(-37.1,38.856) -37.021,38.856 -36.841,38.676 -31.329,38.676 -31.265,38.74 -30.735,38.74 -30.671,38.676 -29.729,38.676 -29.665,38.74 -29.135,38.74 -29.071,38.676 -22.936,38.676 -22.156,37.896 -17.004,37.896 -15.66,39.24 -10.26,39.24 -8.9,40.6 7.663,40.6 8.58,39.683 12.661,39.683 12.711,39.683 12.8,39.772 12.8,39.778 12.888,39.867 13.065,39.867 13.154,39.778 13.154,39.772 13.242,39.683 13.363,39.683 13.655,39.683 13.705,39.683 13.793,39.772 13.793,39.776 13.882,39.865 14.059,39.865 14.147,39.776 14.147,39.772 14.236,39.683 14.304,39.683 14.658,39.683 14.708,39.683 14.796,39.772 14.796,39.779 14.885,39.868 15.062,39.868 15.15,39.779 15.15,39.772 15.239,39.683 15.368,39.683 15.656,39.683 15.706,39.683 15.794,39.772 15.794,39.777 15.883,39.866 16.06,39.866 16.148,39.777 16.148,39.772 16.237,39.683 16.339,39.683 16.684,39.683 16.875,39.875 16.875,40.416 16.817,40.475 16.586,40.475 16.519,40.407 v2(16.519,40.086)
ADCAB_D0_N2: IC6B.61 IC8B.K20 | length 60.9
  Top Layer w0.1: IC6B.61@-38.527,9.006 -38.219,9.006 -38.069,8.856 -37.87,8.856 -37.499,8.484 -36.925,8.484 -36.866,8.543 -36.866,8.684 -37.092,8.91 v1(-37.092,8.941)
  Top Layer w0.145: v2(16.519,4.186) IC8B.K20@17.019,4.686
  Mid-Layer 3 w0.1: v1(-37.092,8.941) -37.066,8.915 -37.066,8.016 -36.815,7.765 -8.381,7.765 -4.325,3.71 0.726,3.71 1.946,4.93 7.533,4.93 8.139,5.536 9.125,5.536 10.095,4.566 16.461,4.566 16.519,4.507 v2(16.519,4.186)
ADCAB_D0_P1: IC6A.60 IC8A.L20 | length 60.5
  Top Layer w0.1: IC6A.60@-38.527,38.306 -38.219,38.306 -38.069,38.456 -37.2,38.456 -37.1,38.356 v1(-37.1,38.256)
  Top Layer w0.145: v2(16.519,41.086) IC8A.L20@17.019,41.586
  Mid-Layer 3 w0.1: v1(-37.1,38.256) -37.021,38.256 -36.841,38.436 -31.23,38.436 -31.166,38.5 -30.834,38.5 -30.77,38.436 -29.63,38.436 -29.566,38.5 -29.234,38.5 -29.17,38.436 -23.036,38.436 -22.256,37.656 -16.905,37.656 -15.561,39 -10.161,39 -8.801,40.36 7.564,40.36 8.48,39.443 12.661,39.443 16.783,39.443 17.115,39.776 17.115,40.515 16.916,40.715 16.578,40.715 16.519,40.773 v2(16.519,41.086)
ADCAB_D0_P2: IC6B.60 IC8B.L20 | length 61.4
  Top Layer w0.1: IC6B.60@-38.527,8.506 -38.219,8.506 -38.069,8.656 -37.953,8.656 -37.581,8.284 -36.842,8.284 -36.666,8.46 -36.666,8.891 -36.502,9.055 v1(-36.502,9.15)
  Top Layer w0.145: v2(16.519,5.186) IC8B.L20@17.019,5.686
  Mid-Layer 3 w0.1: v1(-36.502,9.15) -36.502,8.724 -36.826,8.401 -36.826,8.116 -36.716,8.005 -8.281,8.005 -4.226,3.95 0.627,3.95 1.846,5.17 7.434,5.17 8.04,5.776 9.224,5.776 10.194,4.806 16.461,4.806 16.519,4.864 v2(16.519,5.186)
ADCAB_D2_N1: IC6A.63 IC8A.K26 | length 53.4
  Top Layer w0.1: IC6A.63@-38.527,39.806 -38.219,39.806 -38.069,39.656 -36.678,39.656 -36.6,39.734 -36.6,39.841 -36.8,40.041 v1(-36.8,40.1)
  Top Layer w0.145: v2(10.519,40.086) IC8A.K26@11.019,40.586
  Mid-Layer 2 w0.1: v1(-36.8,40.1) -36.8,40.021 -36.62,39.841 -36.62,39.581 -36.139,39.1 -18.3,39.1 -17.314,40.086 -12.58,40.086 -12.566,40.1 -12.234,40.1 -12.22,40.086 -5.001,40.086 -4.591,40.496 7.971,40.496 8.375,40.496 8.463,40.407 8.463,40.33 8.552,40.242 8.729,40.242 8.817,40.33 8.817,40.407 8.906,40.496 9.083,40.496 9.171,40.407 9.171,40.33 9.26,40.242 9.437,40.242 9.525,40.33 9.525,40.407 9.614,40.496 9.955,40.496 10.707,40.496 10.899,40.304 10.899,40.144 10.841,40.086 v2(10.519,40.086)
  Mid-Layer 3 w0.1: v2(10.519,40.086) v2@10.553,40.052
ADCAB_D2_N2: IC6B.63 IC8B.K26 | length 53.5
  Top Layer w0.1: IC6B.63@-38.527,10.006 -38.219,10.006 -38.069,9.856 -37.5,9.856 -37.4,9.956 v1(-37.4,10.056)
  Top Layer w0.145: v2(8.619,5.186) 8.688,5.186 8.816,5.058 9.564,5.058 10.294,4.328 10.871,4.328 10.961,4.418 10.961,4.627 IC8B.K26@11.019,4.686
  Mid-Layer 2 w0.1: v1(-37.4,10.056) -37.321,10.056 -37.141,9.876 -27.928,9.876 -25.318,7.266 -4.174,7.266 -0.814,3.906 1.855,3.906 3.005,5.056 8.411,5.056 8.541,5.186 v2(8.619,5.186)
ADCAB_D2_P1: IC6A.62 IC8A.K25 | length 53.1
  Top Layer w0.1: IC6A.62@-38.527,39.306 -38.219,39.306 -38.069,39.456 -36.596,39.456 -36.4,39.651 -36.4,39.841 -36.2,40.041 v1(-36.2,40.1)
  Top Layer w0.145: v2(11.519,40.086) IC8A.K25@12.019,40.586
  Mid-Layer 2 w0.1: v1(-36.2,40.1) -36.2,40.021 -36.38,39.841 -36.38,39.68 -36.04,39.34 -18.399,39.34 -17.414,40.326 -12.679,40.326 -12.665,40.34 -12.135,40.34 -12.121,40.326 -5.1,40.326 -4.69,40.736 10.806,40.736 11.139,40.403 11.139,40.144 11.198,40.086 v2(11.519,40.086)
  Mid-Layer 3 w0.1: v2@11.482,40.049 v2(11.519,40.086)
ADCAB_D2_P2: IC6B.62 IC8B.K25 | length 54.4
  Top Layer w0.1: IC6B.62@-38.527,9.506 -38.219,9.506 -38.069,9.656 -37.5,9.656 -37.4,9.556 v1(-37.4,9.456)
  Top Layer w0.145: v2(8.619,4.686) 8.688,4.686 8.816,4.813 9.462,4.813 10.192,4.083 11.029,4.083 11.588,4.643 11.976,4.643 IC8B.K25@12.019,4.686
  Mid-Layer 2 w0.1: v1(-37.4,9.456) -37.321,9.456 -37.141,9.636 -28.027,9.636 -25.417,7.026 -4.273,7.026 -0.913,3.666 1.954,3.666 3.104,4.816 8.411,4.816 8.541,4.686 v2(8.619,4.686)
ADCAB_D4_N1: IC6A.3 IC8A.M26 | length 55.5
  Top Layer w0.1: v1(-40.267,41.834) -40.267,41.776 -40.067,41.576 -40.067,41.468 -40.221,41.314 -40.227,41.314 IC6A.3@-40.227,41.006
  Top Layer w0.145: v2(10.519,42.086) IC8A.M26@11.019,42.586
  Mid-Layer 2 w0.1: v1(-40.267,41.834) -40.267,41.756 -40.087,41.576 -40.087,41.159 -39.888,40.96 -39.005,40.96 -38.354,41.611 -33.267,41.611 -32.616,42.262 -16.738,42.262 -15.77,43.23 -11.87,43.23 -11.373,42.734 10.651,42.734 10.899,42.486 10.899,42.327 10.899,42.144 10.841,42.086 v2(10.519,42.086)
ADCAB_D4_N2: IC6B.3 IC8B.M26 | length 56.7
  Top Layer w0.1: v1(-40.267,12.034) -40.267,11.976 -40.067,11.776 -40.067,11.668 -40.221,11.514 -40.227,11.514 IC6B.3@-40.227,11.206
  Top Layer w0.145: v2(10.519,6.186) IC8B.M26@11.019,6.686
  Mid-Layer 2 w0.1: v1(-40.267,12.034) -40.267,11.956 -40.087,11.776 -40.087,11.199 -39.888,11 -39.037,11 -38.537,11.5 -27.212,11.5 -24.478,8.766 2.208,8.766 3.929,7.045 10.44,7.045 10.899,6.586 10.899,6.427 10.899,6.244 10.841,6.186 v2(10.519,6.186)
ADCAB_D4_P1: IC6A.2 IC8A.M25 | length 55.5
  Top Layer w0.1: IC6A.2@-39.729,41.326 -39.867,41.464 -39.867,41.576 -39.667,41.776 v1(-39.667,41.834) ; IC6A.2@-39.727,41.006 IC6A.2@-39.727,41.326
  Top Layer w0.145: v2(11.519,42.086) IC8A.M25@12.019,42.586
  Mid-Layer 2 w0.1: v1(-39.667,41.834) -39.667,41.756 -39.847,41.576 -39.847,41.259 -39.789,41.2 -39.104,41.2 -38.454,41.851 -33.366,41.851 -32.715,42.502 -16.838,42.502 -15.869,43.47 -11.77,43.47 -11.274,42.974 10.75,42.974 11.139,42.585 11.139,42.227 11.139,42.144 11.198,42.086 v2(11.519,42.086)
ADCAB_D4_P2: IC6B.2 IC8B.M25 | length 56.6
  Top Layer w0.1: IC6B.2@-39.729,11.526 -39.867,11.664 -39.867,11.776 -39.667,11.976 v1(-39.667,12.034) ; IC6B.2@-39.727,11.206 IC6B.2@-39.727,11.526
  Top Layer w0.145: v2(11.519,6.186) IC8B.M25@12.019,6.686
  Mid-Layer 2 w0.1: v1(-39.667,12.034) -39.667,11.956 -39.847,11.776 -39.847,11.298 -39.789,11.24 -39.136,11.24 -38.636,11.74 -27.113,11.74 -24.379,9.006 2.307,9.006 4.028,7.285 10.539,7.285 11.139,6.685 11.139,6.327 11.139,6.244 11.198,6.186 v2(11.519,6.186)
ADCAB_D6_N1: IC6A.5 IC8A.L19 | length 64.1
  Top Layer w0.1: v1(-41.264,42.329) -41.264,42.221 -41.077,42.034 -41.077,41.464 -41.227,41.314 IC6A.5@-41.227,41.006
  Top Layer w0.145: v2(17.519,41.086) IC8A.L19@18.019,41.586
  Mid-Layer 3 w0.1: v1(-41.264,42.329) -41.264,42.251 -41.084,42.071 -41.084,41.445 -40.499,40.86 -36.101,40.86 -34.761,42.2 -15.661,42.2 -14.561,43.3 -5.17,43.3 -4.57,42.7 14.316,42.7 15.55,41.466 17.461,41.466 17.519,41.407 v2(17.519,41.086)
ADCAB_D6_N2: IC6B.5 IC8B.L19 | length 66.6
  Top Layer w0.1: v1(-41.264,12.529) -41.264,12.421 -41.077,12.234 -41.077,11.664 -41.227,11.514 IC6B.5@-41.227,11.206
  Top Layer w0.145: v2(17.519,5.186) IC8B.L19@18.019,5.686
  Mid-Layer 3 w0.1: v1(-41.264,12.529) -41.264,12.451 -41.084,12.271 -41.084,11.423 -40.605,10.943 -38.717,10.943 -38.001,11.66 -25.175,11.66 -24.015,10.5 -9.8,10.5 -9.1,11.2 -7.239,11.2 -4.805,8.766 13.705,8.766 15.165,7.306 15.165,6.101 15.7,5.566 17.461,5.566 17.519,5.507 v2(17.519,5.186)
ADCAB_D6_P1: IC6A.4 IC8A.M19 | length 63.7
  Top Layer w0.1: IC6A.4@-40.727,41.006 -40.727,41.314 -40.877,41.464 -40.877,42.048 -40.664,42.261 v1(-40.664,42.329)
  Top Layer w0.145: v2(17.519,42.086) IC8A.M19@18.019,42.586
  Mid-Layer 3 w0.1: v1(-40.664,42.329) -40.664,42.251 -40.844,42.071 -40.844,41.544 -40.4,41.1 -36.2,41.1 -34.86,42.44 -15.76,42.44 -14.66,43.54 -5.071,43.54 -4.471,42.94 14.415,42.94 15.649,41.706 17.461,41.706 17.519,41.764 v2(17.519,42.086)
ADCAB_D6_P2: IC6B.4 IC8B.M19 | length 66.2
  Top Layer w0.1: IC6B.4@-40.727,11.206 -40.727,11.514 -40.877,11.664 -40.877,12.248 -40.664,12.461 v1(-40.664,12.529)
  Top Layer w0.145: v2(17.519,6.186) IC8B.M19@18.019,6.686
  Mid-Layer 3 w0.1: v1(-40.664,12.529) -40.664,12.451 -40.844,12.271 -40.844,11.522 -40.505,11.183 -38.817,11.183 -38.1,11.9 -25.075,11.9 -23.915,10.74 -9.899,10.74 -9.199,11.44 -7.14,11.44 -4.706,9.006 13.805,9.006 15.405,7.406 15.405,6.2 15.799,5.806 17.461,5.806 17.519,5.864 v2(17.519,6.186)
ADCAB_D8_N1: IC6A.7 IC8A.L25 | length 58.8
  Top Layer w0.1: v1(-42.275,41.852) -42.275,41.8 -42.069,41.593 -42.069,41.473 -42.227,41.314 IC6A.7@-42.227,41.006
  Top Layer w0.145: v2(11.519,41.086) IC8A.L25@12.019,41.586
  Mid-Layer 2 w0.1: v1(-42.275,41.852) -42.275,41.772 -42.096,41.593 -42.096,41.056 -41.099,40.06 -38.401,40.06 -37.83,40.63 -23.43,40.63 -22.724,39.924 -18.836,39.924 -17.761,41 -11.628,41 -11.188,41.439 6.84,41.439 6.841,41.44 11.756,41.44 11.899,41.297 11.899,41.144 11.841,41.086 v2(11.519,41.086)
ADCAB_D8_N2: IC6B.7 IC8B.L25 | length 60.3
  Top Layer w0.1: v1(-42.275,12.052) -42.275,12 -42.069,11.793 -42.069,11.673 -42.227,11.514 IC6B.7@-42.227,11.206
  Top Layer w0.145: v2(11.519,5.186) IC8B.L25@12.019,5.686
  Mid-Layer 2 w0.1: v1(-42.275,12.052) -42.275,11.972 -42.079,11.776 -42.079,10.657 -41.382,9.96 -38.94,9.96 -38.44,10.46 -27.543,10.46 -24.934,7.851 -2.831,7.851 -1.145,6.166 7.419,6.166 7.999,5.586 11.71,5.586 11.899,5.397 11.899,5.244 11.841,5.186 v2(11.519,5.186)
ADCAB_D8_P1: IC6A.6 IC8A.L24 | length 58.8
  Top Layer w0.1: IC6A.6@-41.727,41.006 -41.727,41.323 -41.869,41.464 -41.869,41.635 -41.677,41.827 v1(-41.677,41.893)
  Top Layer w0.145: v2(12.519,41.086) IC8A.L24@13.019,41.586
  Mid-Layer 2 w0.1: v1(-41.677,41.893) -41.677,41.814 -41.856,41.635 -41.856,41.156 -41,40.3 -38.5,40.3 -37.93,40.87 -23.331,40.87 -22.625,40.164 -18.936,40.164 -17.86,41.24 -11.727,41.24 -11.288,41.679 6.74,41.679 6.741,41.68 11.855,41.68 12.139,41.396 12.139,41.144 12.198,41.086 v2(12.519,41.086)
ADCAB_D8_P2: IC6B.6 IC8B.L24 | length 60.4
  Top Layer w0.1: IC6B.6@-41.727,11.206 -41.727,11.523 -41.869,11.664 -41.869,11.835 -41.677,12.027 v1(-41.677,12.093)
  Top Layer w0.145: v2(12.519,5.186) IC8B.L24@13.019,5.686
  Mid-Layer 2 w0.1: v1(-41.677,12.093) -41.677,11.997 -41.839,11.835 -41.839,10.756 -41.283,10.2 -39.039,10.2 -38.539,10.7 -27.443,10.7 -24.834,8.091 -2.731,8.091 -1.046,6.406 7.519,6.406 8.099,5.826 11.81,5.826 12.139,5.496 12.139,5.244 12.198,5.186 v2(12.519,5.186)
ADCAB_D10_N1: IC6A.9 IC8A.L23 | length 63
  Top Layer w0.1: v1(-43.276,42.34) -43.276,42.281 -43.076,42.081 -43.076,41.665 -43.077,41.663 -43.077,41.464 -43.227,41.314 IC6A.9@-43.227,41.006
  Top Layer w0.145: v2(13.519,41.086) IC8A.L23@14.019,41.586
  Mid-Layer 3 w0.1: v1(-43.276,42.34) -43.276,42.261 -43.096,42.081 -43.096,40.526 -41.999,39.43 -19.47,39.43 -18.54,40.36 -10.64,40.36 -9.56,41.44 13.757,41.44 13.899,41.299 13.899,41.144 13.841,41.086 v2(13.519,41.086)
ADCAB_D10_N2: IC6B.9 IC8B.L23 | length 65.6
  Top Layer w0.1: v1(-43.31,12.505) -43.31,12.479 -43.076,12.245 -43.076,11.865 -43.077,11.863 -43.077,11.664 -43.227,11.514 IC6B.9@-43.227,11.206
  Top Layer w0.145: v2(13.519,5.186) IC8B.L23@14.019,5.686
  Mid-Layer 3 w0.1: v1(-43.31,12.505) -43.31,12.439 -43.096,12.225 -43.096,10.756 -42.199,9.86 -38.14,9.86 -37.8,10.2 -37.8,10.222 -37.562,10.46 -37.535,10.46 -37.16,10.835 -37.16,10.84 -37.1,10.9 -25.939,10.9 -24.039,9 -7.539,9 -4.705,6.166 4.139,6.166 4.589,6.616 13.771,6.616 13.886,6.501 13.886,5.244 13.827,5.186 v2(13.519,5.186)
ADCAB_D10_P1: IC6A.8 IC8A.L22 | length 63
  Top Layer w0.1: IC6A.8@-42.727,41.006 -42.727,41.314 -42.877,41.464 -42.877,41.58 -42.876,41.582 -42.876,42.081 -42.676,42.281 v1(-42.676,42.34)
  Top Layer w0.145: v2(14.519,41.086) IC8A.L22@15.019,41.586
  Mid-Layer 3 w0.1: v1(-42.676,42.34) -42.676,42.261 -42.856,42.081 -42.856,40.626 -41.9,39.67 -19.569,39.67 -18.639,40.6 -10.739,40.6 -9.659,41.68 13.857,41.68 14.139,41.398 14.139,41.144 14.198,41.086 v2(14.519,41.086)
ADCAB_D10_P2: IC6B.8 IC8B.L22 | length 65.7
  Top Layer w0.1: IC6B.8@-42.727,11.206 -42.727,11.514 -42.877,11.664 -42.877,11.78 -42.876,11.782 -42.876,12.245 -42.676,12.445 v1(-42.676,12.54)
  Top Layer w0.145: v2(14.519,5.186) IC8B.L22@15.019,5.686
  Mid-Layer 3 w0.1: v1(-42.676,12.54) -42.749,12.466 -42.749,12.19 -42.856,12.083 -42.856,10.856 -42.1,10.1 -38.239,10.1 -38.04,10.299 -38.04,10.321 -37.661,10.7 -37.634,10.7 -37.4,10.934 -37.4,10.939 -37.199,11.14 -25.84,11.14 -23.94,9.24 -7.44,9.24 -4.606,6.406 4.039,6.406 4.489,6.856 13.87,6.856 14.126,6.6 14.126,5.244 14.185,5.186 v2(14.519,5.186)
ADCAB_D12_N1: IC6A.11 IC8A.J26 | length 61.1
  Top Layer w0.1: v1(-44.26,41.864) -44.21,41.814 -44.21,41.398 -44.227,41.38 IC6A.11@-44.227,41.006
  Top Layer w0.145: v2(10.519,39.086) IC8A.J26@11.019,39.586
  Mid-Layer 2 w0.1: v1(-44.26,41.864) -44.26,41.785 -44.08,41.605 -44.08,40.04 -41.539,37.5 -31.305,37.5 -31.265,37.46 -30.735,37.46 -30.695,37.5 -29.705,37.5 -29.665,37.46 -29.135,37.46 -29.095,37.5 -13.861,37.5 -12.83,38.53 -5.027,38.53 -4.094,39.463 10.838,39.463 10.899,39.402 10.899,39.144 10.841,39.086 v2(10.519,39.086)
ADCAB_D12_N2: IC6B.11 IC8B.J26 | length 64.2
  Top Layer w0.1: v1(-44.26,12.064) -44.21,12.014 -44.21,11.598 -44.227,11.58 IC6B.11@-44.227,11.206
  Top Layer w0.145: v2(10.519,3.186) IC8B.J26@11.019,3.686
  Mid-Layer 2 w0.1: v1(-44.26,12.064) -44.26,11.985 -44.08,11.805 -44.08,9.74 -42.239,7.9 -27.692,7.9 -26.143,6.351 -6.05,6.351 -0.915,1.216 1.627,1.216 4.023,3.613 10.841,3.613 10.899,3.554 10.899,3.244 10.841,3.186 v2(10.519,3.186)
ADCAB_D12_P1: IC6A.10 IC8A.J25 | length 61.1
  Top Layer w0.1: IC6A.10@-43.727,41.006 -43.71,41.024 -43.71,41.814 v1(-43.66,41.864)
  Top Layer w0.145: v2(11.519,39.086) IC8A.J25@12.019,39.586
  Mid-Layer 2 w0.1: v1(-43.66,41.864) -43.66,41.785 -43.84,41.605 -43.84,40.14 -41.44,37.74 -31.206,37.74 -31.166,37.7 -30.834,37.7 -30.794,37.74 -29.606,37.74 -29.566,37.7 -29.234,37.7 -29.194,37.74 -13.96,37.74 -12.93,38.77 -5.126,38.77 -4.194,39.703 10.938,39.703 11.139,39.501 11.139,39.144 11.198,39.086 v2(11.519,39.086)
ADCAB_D12_P2: IC6B.10 IC8B.J25 | length 64.1
  Top Layer w0.1: IC6B.10@-43.727,11.206 -43.71,11.224 -43.71,11.967 v1(-43.66,12.017)
  Top Layer w0.145: v2(11.519,3.186) IC8B.J25@12.019,3.686
  Mid-Layer 2 w0.1: v1(-43.66,12.017) -43.66,11.985 -43.84,11.805 -43.84,9.84 -42.14,8.14 -27.593,8.14 -26.044,6.591 -5.95,6.591 -0.815,1.456 1.527,1.456 3.924,3.853 10.94,3.853 11.139,3.654 11.139,3.244 11.198,3.186 v2(11.519,3.186)
ADCAB_VINA_N: C156D.2 R5A.1 R29D.2 X20D.7 | length 50
  Top Layer w0.1: R5A.1@-50.3,38.24 -50.06,38.48 -50.009,38.48 -49.88,38.609 -49.88,38.791 -50.08,38.991 v1(-50.08,39.05)
  Top Layer w0.145: v1(-82.2,47.4) -82.2,47.385 -82.115,47.3 -81.6,47.3 R29D.2@-81.4,47.1
  Top Layer w0.3: R29D.2@-81.4,47.1 C156D.2@-81.4,48.5
  Mid-Layer 2 w0.1: v1(-82.2,47.4) -82.2,49.1 -80.8,50.5 -78.599,50.5 -75.099,47 -73.939,47 -69.249,42.31 -66.129,42.31 -65.059,42.31 -65,42.251 ; v1(-50.08,39.05) -50.05,39.05 -49.9,38.9 -49.9,42.1 -51.16,43.36 -60.36,43.36 -61.8,44.8 -63,44.8 -63.56,44.24 -63.56,43.001 -64.251,42.31 -64.941,42.31 -65,42.251 ; -65,42.251 X20D.7@-65,41.16 -65,42.251
ADCAB_VINA_P: C154D.2 R4A.1 R12D.2 X20D.6 | length 48.4
  Top Layer w0.1: v1(-49.48,39) -49.48,38.941 -49.68,38.741 -49.68,38.539 -49.66,38.519 -49.66,38.48 -49.42,38.24 R4A.1@-49.4,38.24
  Top Layer w0.145: R12D.2@-81.568,54.268 -81.4,54.1 -81.4,53.585 -81.502,53.483 v1(-81.502,53.468)
  Top Layer w0.3: R12D.2@-81.568,54.268 C154D.2@-81.568,55.668
  Mid-Layer 2 w0.1: v1(-81.502,53.468) -81.502,51.442 -80.8,50.74 -78.5,50.74 -75,47.24 -73.84,47.24 -69.15,42.55 -66.03,42.55 -65.059,42.55 -65,42.609 ; X20D.6@-65,43.7 -65,42.609 ; v1(-49.48,39) -49.56,39 -49.66,38.9 -49.66,40.199 -49.66,42.199 -51.061,43.6 -60.261,43.6 -61.701,45.04 -63.099,45.04 -63.8,44.339 -63.8,43.1 -64.35,42.55 -64.941,42.55 -65,42.609
ADCAB_VINB_N: C156B.2 R5B.1 R29B.2 X20B.7 | length 50.9
  Top Layer w0.145: v1(-82.2,17.2) -81.7,17.2 R29B.2@-81.4,16.9 ; R5B.1@-50.562,8.344 -50.344,8.561 -50.288,8.561 -50.203,8.646 -50.203,8.899 -50.203,9.2 -50.303,9.3 v1(-50.381,9.3)
  Top Layer w0.3: R29B.2@-81.4,16.9 C156B.2@-81.4,18.3
  Mid-Layer 2 w0.1: v1(-82.2,17.2) -82.2,19.8 -81.1,20.9 -77.739,20.9 -69.149,12.31 -65.059,12.31 -65,12.251 ; X20B.7@-65,11.16 -65,12.251 ; v1(-50.381,9.3) -50.381,9.379 -50.201,9.559 -50.201,13.501 -52.7,16 -60.461,16 -61.661,14.8 -63.16,14.8 -63.56,14.4 -63.56,13.101 -64.351,12.31 -64.941,12.31 -65,12.251
ADCAB_VINB_P: C154B.2 R4B.1 R12B.2 X20B.6 | length 51.1
  Top Layer w0.145: v1(-82.2,24.6) -82.2,24.585 -82.115,24.5 -81.6,24.5 R12B.2@-81.4,24.3 ; v1(-49.781,9.3) -49.858,9.3 -49.958,9.2 -49.958,9.002 -49.958,8.642 -49.873,8.557 -49.817,8.557 R4B.1@-49.6,8.34
  Top Layer w0.3: R12B.2@-81.4,24.3 C154B.2@-81.4,25.7
  Mid-Layer 2 w0.1: v1(-82.2,24.6) -82.2,22.24 -81.1,21.14 -77.64,21.14 -69.05,12.55 -65.059,12.55 -65,12.609 ; X20B.6@-65,13.7 -65,12.609 ; v1(-49.781,9.3) -49.781,9.379 -49.961,9.559 -49.961,13.6 -52.601,16.24 -60.56,16.24 -61.76,15.04 -63.259,15.04 -63.8,14.499 -63.8,13.2 -64.45,12.55 -64.941,12.55 -65,12.609
ADCB_VINA_N: C156A.2 J6B.1 R29A.2 X20A.7 | length 38.7
  Top Layer w0.1: X20A.7@-62.46,11.16 -62.46,12.271 -62.401,12.33 -61.2,12.33 -61,12.13 -61,10.417 -60.641,10.059 -60.541,9.959 -58.741,9.959 -58.683,9.9 -58.683,8.708 J6B.1@-58.5,8.525
  Top Layer w0.3: v1(-82.7,3.5) -81.7,3.5 C156A.2@-81.5,3.7 R29A.2@-81.5,2.3
  Mid-Layer 2 w0.1: v1(-82.7,3.5) -82.7,5.794 -81.934,6.56 -78.74,6.56 -76.77,8.53 -74.57,8.53 -73.999,7.96 -66.101,7.96 -63.6,10.461 -63.6,12 -63.29,12.31 -62.6,12.31 -62.46,12.17 X20A.7@-62.46,11.16
ADCB_VINA_P: C154A.2 J4B.1 R12A.2 X20A.6 | length 39.3
  Top Layer w0.1: X20A.6@-62.46,13.7 -62.46,12.589 -62.401,12.53 -61.117,12.53 -60.8,12.213 -60.8,10.5 -60.459,10.159 -58.741,10.159 -58.683,10.217 -58.683,11.292 J4B.1@-58.5,11.475
  Top Layer w0.3: v1(-81.8,11.475) -81.85,11.425 -81.85,11.025 -81.525,10.7 C154A.2@-81.5,10.7 R12A.2@-81.5,9.3
  Mid-Layer 2 w0.1: v1(-81.8,11.475) -81.8,7.042 -81.558,6.8 -78.839,6.8 -76.869,8.77 -74.47,8.77 -73.9,8.2 -66.2,8.2 -63.84,10.56 -63.84,12.099 -63.389,12.55 -62.6,12.55 -62.46,12.69 X20A.6@-62.46,13.7
ADCB_VINC_N: C156C.2 J6A.1 R29C.2 X20C.7 | length 37.3
  Top Layer w0.145: X20C.7@-62.46,41.16 -62.163,41.458 -62.163,42.145 -62,42.307 -61.207,42.307 -59.3,40.4 -58.677,40.4 -58.385,40.4 -58.3,40.315 -58.3,39.171 J6A.1@-58.3,39.146
  Top Layer w0.3: v1(-82.1,33.6) -81.597,33.6 C156C.2@-81.3,33.897 R29C.2@-81.3,32.5 ; J6A.1@-58.675,39.521 -58.65,39.521 J6A.1@-58.3,39.171
  Mid-Layer 2 w0.1: v1(-82.1,33.6) -81.589,34.111 -81.589,36.79 -81.319,37.06 -78.64,37.06 -76.67,39.03 -74.37,39.03 -73.899,38.56 -64.841,38.56 -63.5,39.901 -63.5,42.01 -63.2,42.31 -62.7,42.31 -62.46,42.07 X20C.7@-62.46,41.16
ADCB_VINC_P: C154C.2 J4A.1 R12C.2 X20C.6 | length 36.2
  Top Layer w0.145: X20C.6@-62.46,43.7 -62.163,43.402 -62.163,42.715 -62,42.552 -61.106,42.552 -59.198,40.645 -58.779,40.645 -58.385,40.645 -58.3,40.73 J4A.1@-58.3,41.989
  Top Layer w0.3: v1(-82.1,40.1) -81.692,40.1 R12C.2@-81.396,39.804 -81.396,41.196 C154C.2@-81.4,41.2
  Mid-Layer 2 w0.1: v1(-82.1,40.1) -81.7,39.7 -81.7,37.581 -81.419,37.3 -78.739,37.3 -76.769,39.27 -74.27,39.27 -73.8,38.8 -64.94,38.8 -63.74,40 -63.74,42.109 -63.299,42.55 -62.7,42.55 -62.46,42.79 X20C.6@-62.46,43.7
ADCBA_D0_N1: IC7A.41 IC8A.AD25 | length 68
  Top Layer w0.1: IC7A.41@-42.727,44.156 -42.727,43.847 -42.877,43.697 -42.877,43.499 -42.88,43.496 -42.88,43.245 -42.686,43.051 v1(-42.686,42.945)
  Top Layer w0.145: v2(11.519,55.086) IC8A.AD25@12.019,54.586
  Mid-Layer 2 w0.1: v1(-42.686,42.945) -42.686,43.024 -42.866,43.204 -42.866,48.334 -41.7,49.5 -36.799,49.5 -35.806,50.493 -34.932,50.493 -33.639,49.2 -29.19,49.2 -27.882,50.508 -2.736,50.508 1.049,54.293 2.887,54.293 4.18,55.586 8.419,55.586 8.691,55.858 9.249,55.858 9.653,55.858 9.742,55.769 9.742,55.692 9.83,55.604 10.007,55.604 10.096,55.692 10.096,55.769 10.184,55.858 10.361,55.858 10.45,55.769 10.45,55.692 10.538,55.604 10.715,55.604 10.804,55.692 10.804,55.769 10.892,55.858 11.242,55.858 11.58,55.858 11.899,55.539 11.899,55.144 11.841,55.086 v2(11.519,55.086)
ADCBA_D0_N2: IC7B.41 IC8B.AD25 | length 65.4
  Top Layer w0.1: IC7B.41@-42.727,14.356 -42.727,14.047 -42.877,13.897 -42.877,13.699 -42.88,13.696 -42.88,13.445 -42.686,13.251 v1(-42.686,13.145)
  Top Layer w0.145: v2(11.519,19.186) IC8B.AD25@12.019,18.686
  Mid-Layer 2 w0.1: v1(-42.686,13.145) -42.686,13.224 -42.866,13.404 -42.866,17.934 -41.04,19.76 -36.94,19.76 -36.27,20.43 -34.27,20.43 -33.339,19.5 -24.541,19.5 -23.871,20.17 -13.8,20.17 -13.37,20.6 7.306,20.6 8.09,19.816 9.889,19.816 10.293,19.816 10.382,19.728 10.382,19.651 10.47,19.562 10.647,19.562 10.736,19.651 10.736,19.728 10.824,19.816 11.001,19.816 11.09,19.728 11.09,19.651 11.178,19.562 11.355,19.562 11.444,19.651 11.444,19.728 11.532,19.816 11.628,19.816 11.722,19.816 11.899,19.639 11.899,19.244 11.841,19.186 v2(11.519,19.186)